# Altium PCB project_2.PcbDoc
Units mil, origin at the board's own origin, x right, y up, seen from the top; angles counter-clockwise.
Board outline 3900.9 x 2136.88 mil, 2 copper layers (Top Layer, Bottom Layer); 42 components, 62 nets, 220 pads, 22 vias.
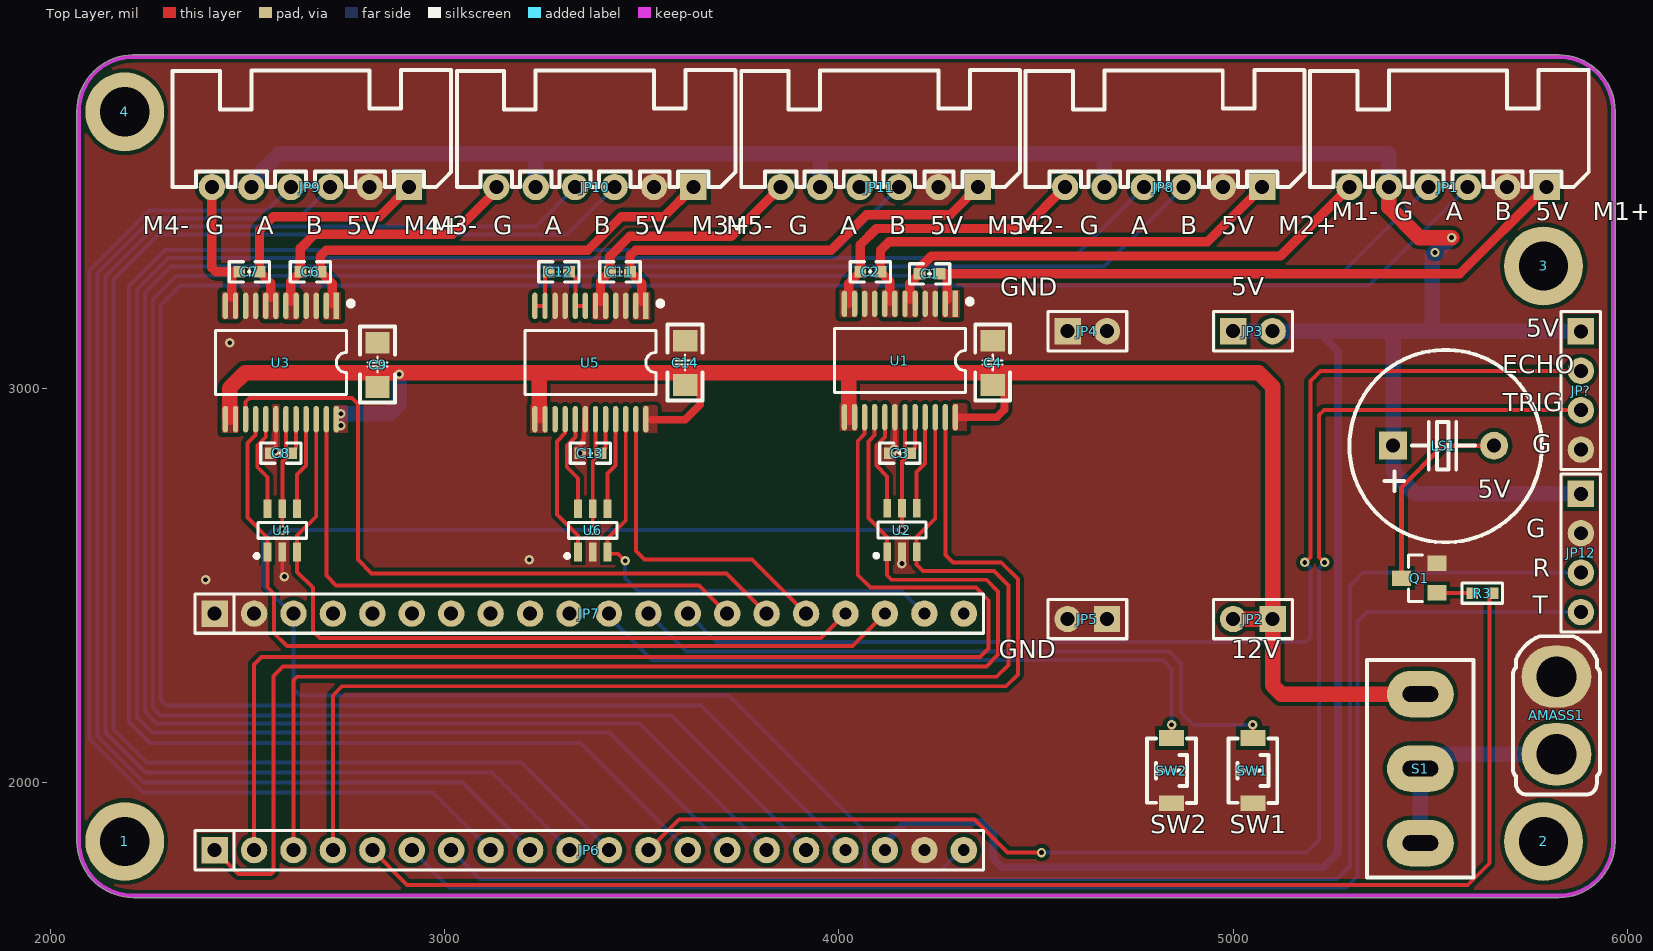
[diagram p0: Top Layer view]
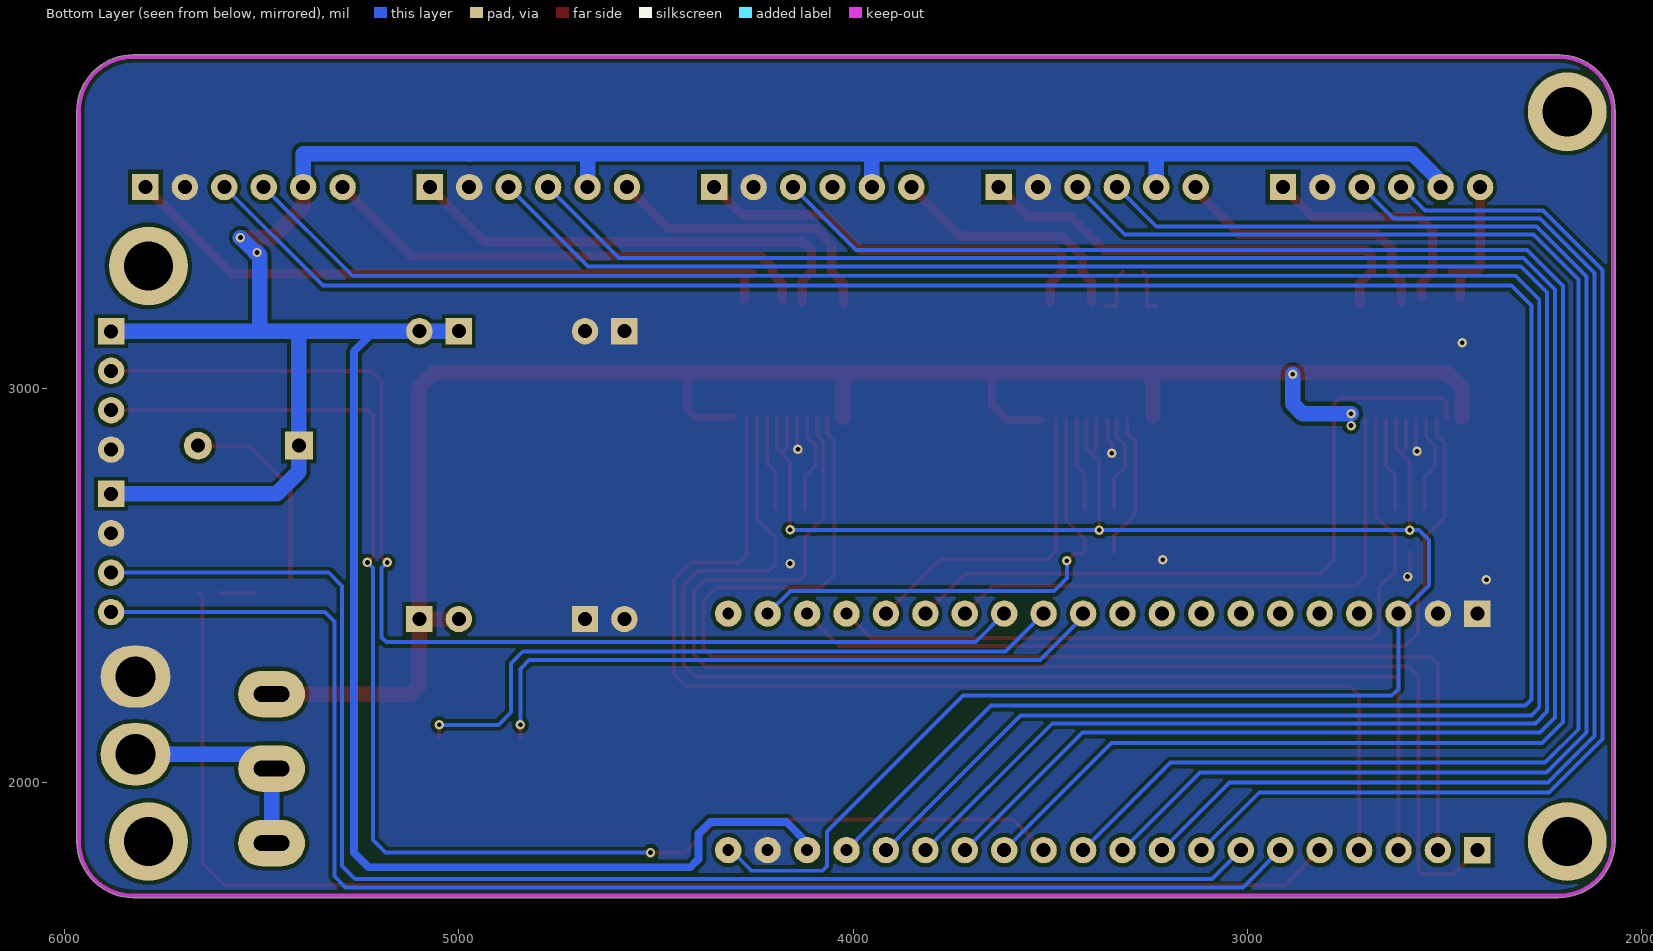
[diagram p1: Bottom Layer view, seen from below]

## Layer stack, top to bottom
Top Solder: solder mask 0.4, Solder Resist, Dk 3.5
Top Layer: signal copper 1.4
Dielectric 1: dielectric 12.6, FR-4, Dk 4.8
Bottom Layer: signal copper 1.4
Bottom Solder: solder mask 0.4, Solder Resist, Dk 3.5

## Board outline
2210,1708.13 ccw(c2210,1713.15) 2210.08,1708.13 5826.38,1708.13 5826.77,1708.13 ccw(c5826.77,1713.15) 5826.86,1708.14 ccw(c5826.38,1850.39) 5968.64,1849.91 ccw(c5826.38,1850.39) 5968.64,1850.39 ccw(c5826.38,1850.39) 5968.64,1850.39 5968.64,3702.7 ccw(c5963.62,3702.76) 5968.64,3702.76 ccw(c5826.38,3702.76) 5826.86,3845.01 ccw(c5826.38,3702.76) 5826.77,3845.01 ccw(c5826.38,3702.76) 5826.38,3845.01 5826.77,3845.01 cw(c5826.77,3840) 5826.86,3845.01 5826.77,3845.01 2210,3845.02 ccw(c2210,3840) 2209.94,3845.01 cw(c2210,3702.76) 2210,3845.01 2209.94,3845.01 ccw(c2210,3702.76) 2067.74,3702.76 ccw(c2072.76,3702.76) 2067.88,3701.57 ccw(c2072.76,3700.39) 2067.74,3700.39 2067.74,1850.39 ccw(c2210,1850.39)

## Design rules (kind name [scope] priority, off if disabled: settings)
Clearance [All] p1: gap=10 ignorepadtopadclearanceinfootprint=FALSE except(0: Arc-Hole Track-Hole SMDPad-Hole THPad-Hole Via-Hole Fill-Hole Poly-Hole Region-Hole Text-Hole)
PolygonConnect [All] p1: connectstyle=Direct reliefconductorwidth=10 reliefentries=4 polygonreliefangle="90 Angle" airgapwidth=10
RoutingVias [All] p1: holewidth=28 width=50 viastyle="Through Hole" minholewidth=28 minwidth=50 maxholewidth=28 maxwidth=50
SolderMaskExpansion [All] p1: expansion=4 istentingtop=FALSE
Width [All] p1: maxlimit=393.7 minlimit=10 preferedwidth=10 minimp=50.000000 maximp=50.000000 favimp=50.000000
30 further rules are at their usual default settings.

## Components (designator, comment, footprint, x,y, rotation, side; value= is the part's Value field where it differs from the comment)
1 "M3" "M3 125X200" 2188.98,1850.39 r90 top
2 "M3" "M3 125X200" 5787.4,1850.39 r90 top
3 "M3" "M3 125X200" 5787.4,3310 r90 top
4 "M3" "M3 125X200" 2188.98,3700.79 r90 top
AMASS1 "XT30x-F" XT30U-M 5820,2170 r90 top
C1 "100nF" "C 0603_L" 4230,3290 r0 top
C2 "100nF" "C 0603_L" 4080,3295 r0 top
C3 "100nF" "C 0603_L" 4155,2835 r0 top
C4 "100nF" "C 1206_L" 4390,3065 r270 top
C6 "100nF" "C 0603_L" 2660,3295 r0 top
C7 "100nF" "C 0603_L" 2505,3295 r0 top
C8 "100nF" "C 0603_L" 2585,2835 r0 top
C9 "100nF" "C 1206_L" 2830,3060 r270 top
C11 "100nF" "C 0603_L" 3445,3295 r0 top
C12 "100nF" "C 0603_L" 3290,3295 r0 top
C13 "100nF" "C 0603_L" 3370,2835 r0 top
C14 "100nF" "C 1206_L" 3610,3065 r270 top
JP1 "HDR-1X6" XH2.54-WI-6P 5545,3510 r180 top
JP2 "HDR-1X2" HDR2.54-LI-2P 5050.12,2414.41 r180 top
JP3 "HDR-1X2" HDR2.54-LI-2P 5050.12,3144.41 r0 top
JP4 "HDR-1X2" HDR2.54-LI-2P 4630.12,3144.41 r0 top
JP5 "HDR-1X2" HDR2.54-LI-2P 4630.12,2414.41 r180 top
JP6 "HDR-1X20" HDR2.54-LI-20P 3366.93,1828.23 r0 top locked
JP7 "HDR-1X20" HDR2.54-LI-20P 3366.93,2428.23 r0 top locked
JP8 "HDR-1X6" XH2.54-WI-6P 4823.75,3510 r180 top
JP9 "HDR-1X6" XH2.54-WI-6P 2660,3510 r180 top
JP10 "HDR-1X6" XH2.54-WI-6P 3381.25,3510 r180 top
JP11 "HDR-1X6" XH2.54-WI-6P 4102.5,3510 r180 top
JP12 "HDR-1X4" HDR2.54-LI-4P 5882,2582 r270 top
JP? "HDR-1X4" HDR2.54-LI-4P 5882,2994 r270 top
LS1 "Buzzer" BUZZER_1260_I 5534,2854 r270 top
Q1 "SS8050" SOT23-3N 5472,2518 r90 top
R3 "1K" "R 0603_L" 5632,2480 r0 top
S1 "SS-12F23" SS-12D10 5475,2035 r90 top
SW1 "6x6x5" "TSW SMD-3*4*2" 5050,2030 r270 top
SW2 "6x6x5" "TSW SMD-3*4*2" 4844,2030 r270 top
U1 "TB6612FNG" SSOP24_N 4155,3070 r270 top
U2 "SN76LVC2G14DBV" SOT23-6N 4160,2640 r0 top
U3 "TB6612FNG" SSOP24_N 2585,3065 r270 top
U4 "SN76LVC2G14DBV" SOT23-6N 2588.39,2639.41 r0 top
U5 "TB6612FNG" SSOP24_N 3370,3065 r270 top
U6 "SN76LVC2G14DBV" SOT23-6N 3375.89,2639.41 r0 top

## Footprints (in the part's own frame and the unit in brackets; to place one, negate y for a bottom-side part, rotate by r counter-clockwise, add the part's x,y. Pads: shape width x height; smd on the part's side, far side on the other; paste and mask are expansions set on the pad)
BUZZER_1260_I [mm] "6.5*12*6mm(脚距,直径,高度)"
  rect 1.8x1.8 hole 0.9: 1(0,-3.25)
  round 1.8 hole 0.9: 2(0,3.25)
  silkscreen extent -6.17,-6.07 6.22,6.33, body extent -6,-6 6,6, height 6.05
"C 0603_L" [mil] "无极性贴片电容"
  rect 30x30 smd: 1(-25.59,0) 2(25.59,0)
  silkscreen extent -51,-26 51,26, body extent -31,-16 31,16, height 32
"C 1206_L" [mil] "无极性贴片电容"
  rect 55x62 smd: 1(-55.12,0) 2(57.09,0)
  silkscreen extent -96,-44 96,44, body extent -63,-32 63,32, height 48
HDR2.54-LI-2P [mm] "排针，2脚"
  rect 1.7x1.7 hole 0.9: 1(-1.27,0)
  round 1.7 hole 0.9: 2(1.27,0)
  silkscreen extent -2.54,-1.27 2.54,1.27, body extent -2.54,-1.27 2.54,1.27, height 8.5
HDR2.54-LI-4P [mm] "排针，4脚"
  rect 1.7x1.7 hole 0.9: 1(-3.81,0)
  round 1.7 hole 0.9: 2(-1.27,0) 3(1.27,0) 4(3.81,0)
  silkscreen extent -5.08,-1.27 5.08,1.27, body extent -5.08,-1.27 5.08,1.27, height 8.5
HDR2.54-LI-20P [mm] "排针，20脚"
  rect 1.7x1.7 hole 0.9: 1(-24.13,0)
  round 1.7 hole 0.9: 2(-21.59,0) 3(-19.05,0) 4(-16.51,0) 5(-13.97,0) 6(-11.43,0) 7(-8.89,0) 8(-6.35,0) 9(-3.81,0) 10(-1.27,0) 11(1.27,0) 12(3.81,0) 13(6.35,0) 14(8.89,0) 15(11.43,0) 16(13.97,0)
  round 1.7 hole 0.762: 17(16.51,0) 18(19.05,0) 19(21.59,0) 20(24.13,0)
  silkscreen extent -25.4,-1.27 25.4,1.27, body extent -25.4,-1.27 25.4,1.27, height 8.5
"M3 125X200" [mil] "M3螺丝孔，孔125Mil，焊盘200Mil"
  round 200 hole 125: 1(0,0)
"R 0603_L" [mil] "1/10W贴片电阻"
  rect 30x30 smd: 1(-25.59,0) 2(25.59,0)
  silkscreen extent -51,-26 51,26, body extent -31,-16 32,16, height 16
SOT23-3N [mm] "3x1.3x1mm(长宽高)"
  rect 1x1.2 smd: 1(-0.95,-1.143) 2(0.95,-1.143) 3(0,1.143)
  silkscreen extent -1.5,-0.2 1.5,0.7, body extent -1.5,-1.2 1.5,1.2, height 1.05
SOT23-6N [mm] "3x1.6x1.1mm(长宽高)"
  rect 0.5x1.2 smd: 1(-0.95,-1.4) 2(0,-1.4) 3(0.95,-1.4) 4(0.95,1.4) 5(0,1.4) 6(-0.95,1.4)
  silkscreen extent -1.78,-1.78 1.55,0.51, body extent -1.5,-1.4 1.5,1.4, height 1.15
SS-12D10 [mm] "脚距4.8mm"
  oval 3x4.3 hole 2.3 slot 1 at 0 deg: 1(-4.8,0) 2(0,0) 3(4.8,0)
  silkscreen extent -7,-3.43 7,3.43, body extent -6.71,-3.3 6.71,3.3, height 11.8
SSOP24_N [mm] "8.3*7.8*1.6（长宽高）"
  rect 1.7x0.35 smd: 1(-3.65,3.575)
  oval 1.7x0.35 smd: 2(-3.65,2.925) 3(-3.65,2.275) 4(-3.65,1.625) 5(-3.65,0.975) 6(-3.65,0.325) 7(-3.65,-0.325) 8(-3.65,-0.975) 9(-3.65,-1.625) 10(-3.65,-2.275) 11(-3.65,-2.925) 12(-3.65,-3.575) 13(3.65,-3.575) 14(3.65,-2.925) 15(3.65,-2.275) 16(3.65,-1.625) 17(3.65,-0.975) 18(3.65,-0.325) 19(3.65,0.325) 20(3.65,0.975) 21(3.65,1.625) 22(3.65,2.275) 23(3.65,2.925) 24(3.65,3.575)
  silkscreen extent -3.93,-4.23 2.06,4.63, body extent -3.85,-4.15 3.85,4.15, height 1.65
"TSW SMD-3*4*2" [mm] "3*4*2mm"
  rect 1x1.6 smd: 1(-2.1,0) 2(2.1,0)
  silkscreen extent -2.08,-1.58 2.08,1.58, body extent -2.45,-1.45 2.45,1.45, height 2
XH2.54-WI-6P [mm] "接插件，6P"
  rect 1.7x1.7 hole 0.9: 1(-6.35,0)
  round 1.7 hole 0.9: 2(-3.81,0) 3(-1.27,0) 4(1.27,0) 5(3.81,0) 6(6.35,0)
  silkscreen extent -9.07,-7.53 8.89,0, body extent -8.85,-7.35 8.85,0.35, height 5.75
XT30U-M [mm] "长：10.2mm，宽：5.2mm，高：10.7mm"
  oval 4x4.5 hole 2.6: 1(-2.5,0) 2(2.5,0)
  silkscreen extent -5.1,-2.8 5.1,2.8, body extent -5.1,-2.8 5.1,2.8, height 10.71

## Part data
1 2 3 4: "铜柱孔"
AMASS1: library part XT30, "Amass防打火电源接口，XT30系列"
C1 C2 C3 C4 C6 C7 C8 C9 C11 C12 C13 C14: library part C, "无极性贴片电容", BOM名称=无极性, 学习资源=www.ooocke.
JP1 JP8 JP9 JP10 JP11: library part "Header 6", "6P接插件", BOM名称=6P接, 学习资源=www.ooocke.
JP2 JP3 JP4 JP5: library part "Header 2", "2P接插件", BOM名称=2P接, 学习资源=www.ooocke.
JP6 JP7: library part "Header 20", "20P接插件", BOM名称=20P接, 学习资源=www.ooocke.
JP12 JP?: library part "Header 4", "4P接插件"
  JP12: BOM名称=4P接, 学习资源=www.ooocke.
  JP?: BOM名称=4P接插件, 学习资源=www.ooocke.com, 版权归属=源创客
LS1: "蜂鸣器"
Q1: library part 8050-SMD, "高频放大-NPN型", BOM名称=高频放大, 学习资源=www.ooocke., 属性="40V 1.5A 1W 100MH"
R3: library part R, "贴片电阻", BOM名称=贴?, 学习资源=www.ooocke.
S1: library part SSW-1P, "1路拨动开关", BOM名称=波?, 学习资源=www.ooocke.
SW1 SW2: library part "TSW SMD-6x6", "贴片6x6轻触开关", BOM名称=贴片6x6?, 学习资源=www.ooocke.
U1 U3 U5: library part Component_1

## Via types
v1: diameter 24, hole 12, Top Layer to Bottom Layer, 22 vias

## Nets (pads, with @x,y where several pads share a name; then routed paths per layer and width w, separated by ;. In a path a pad name is that pad's centre, name@x,y a point inside that pad or via, vN(x,y) a via of type N, cw(c..) or ccw(c..) an arc to the next point about the centre after c; other vN are vias at no path point)
3V3: C3.2 C8.2 C13.2 JP6.20 JP7.3 U1.19 U1.20 U2.5 U3.19 U3.20 U4.5 U5.19 U5.20 U6.5 | length 5179.3
  Top Layer w10: v1(2588.39,2640) U4.5 2589.41,2695.54 2589.41,2813.82 C8.2 ; U3.19 2597.8,2847.79 C8.2 ; U3.20 2623.39,2847.8 C8.2 ; v1(3375.89,2640) U6.5 3375.89,2815.3 C13.2 ; U5.19 3382.8,2847.79 C13.2 ; U5.20 3408.39,2847.8 C13.2 ; v1(4160,2640.6) U2.5 4160,2814.41 C3.2 ; U1.19 4167.8,2847.79 C3.2 ; U1.20 4193.39,2847.8 C3.2
  Bottom Layer w10: 4096.46,2639.14 4095,2640.6 ; v1(4160,2640.6) 4095,2640.6 ; JP6.20 4310.23,1828.23 4258,1776 4078,1776 4066,1788 4066,1876 3722,2220 2634,2220 2616.93,2237.07 JP7.3 2611.77,2428.23 2540,2500 2540,2614.6 2565.41,2640 v1(2588.39,2640) v1(3375.89,2640) 3376.48,2640.6 4095,2640.6
5V: JP1.5 JP3.1 JP3.2 JP6.18 JP8.5 JP9.5 JP10.5 JP11.5 JP12.1 JP?.1 LS1.1 | length 8248.1
  Top Layer w39.37: JP1.5 5395,3459 5472,3382 v1(5554,3382)
  Bottom Layer w20: JP6.18 4116.93,1846.93 4170,1900 4362,1900 4392,1870 4392,1806 4413,1785 5229,1785 5266,1822 5266,3093.41 5215,3144.41
  Bottom Layer w39.37: JP9.5 2510,3524 2581,3595 3218,3595 ; JP10.5 3231.25,3581.75 3218,3595 ; JP11.5 3952.5,3591.5 3956,3595 ; JP8.5 4673.75,3589.25 4668,3595 ; 4973.75,3593.75 4975,3595 ; JP3.1 JP3.2 5215,3144.41 5499.41,3144.41 5505,3150 5505,3337 v1(5512,3344) 5516,3344 v1(5554,3382) ; JP1.5 5395,3595 4975,3595 ; JP12.1 5462,2732 5406.05,2787.95 LS1.1 5406.05,3144 JP?.1 ; 3218,3595 3956,3595 ; 3956,3595 4668,3595 ; 4668,3595 4975,3595
12VDC: C4.2 C9.2 C14.2 JP2.1 JP2.2 S1.3 U1.13 U1.14 U1.24 U3.13 U3.14 U3.24 U5.13 U5.14 U5.24 | length 4879
  Top Layer w19.68: 3525,2920 3610,2920 3648.56,2958.56 3648.56,3035 ; 4307.2,2925.91 4400.91,2925.91 4420,2945 4420,3039.41
  Top Layer w39.37: 2455,2925.91 2455,3000 2494.41,3039.41 3240,3039.41 ; 3240,2930 3240,3039.41 ; 4025,2926.3 4025,3039.41 ; JP2.2 JP2.1 ; S1.3 5122.02,2223.98 5100.12,2245.88 JP2.1 ; 3240,3039.41 4025,3039.41 ; 4025,3039.41 4420,3039.41 5064.59,3039.41 5100.12,3003.88 JP2.1
  Bottom Layer w39.37: v1(2737.2,2935) 2860,2935 2885,2960 v1(2885,3035)
  other v1: 2737.2,2905
BEEF: JP6.5 R3.2 | length 3580.5
  Top Layer w10: JP6.5 2905.16,1740 5595,1740 5650,1795 5650,2472.41 R3.2
DIR_M1: JP6.3 U1.22 U2.3 | length 3109.6
  Top Layer w10: JP6.3 2616.93,2258.93 2626,2268 4400,2268 4430,2298 4430,2500 4394,2536 4214,2536 4197.4,2552.6 U2.3 4197.4,2622.4 4244.57,2669.57 U1.22
DIR_M2: JP6.1 U1.16 U2.1 | length 3418.7
  Top Layer w10: JP6.1 2477.16,1768 2560,1768 2566,1774 2566,2270 2590,2294 4374,2294 4404,2324 4404,2484 4374,2514 4134,2514 4122.6,2525.4 U2.1 4122.6,2622.83 4075,2670.43 4075,2865 4091.02,2881.02 U1.16
DIR_M3: JP7.17 U3.22 U4.3 | length 1958.3
  Top Layer w10: U3.22 2674.57,2674.57 2625.79,2625.79 U4.3 2625.79,2534.21 2666,2494 2666,2384 2684,2366 3954.7,2366 JP7.17
DIR_M4: JP7.18 U3.16 U4.1 | length 2176.2
  Top Layer w10: U3.16 2521.02,2881.61 2500,2860.59 2500,2671.52 2550.98,2620.53 U4.1 2550.98,2495.02 2568,2478 2568,2378.4 2600.4,2346 4034.7,2346 JP7.18
DIR_M5: JP7.19 U5.22 U6.3 | length 1250.2
  Top Layer w10: v1(3458,2562) 3440,2580 3417.58,2580 U6.3 3413.29,2618.29 3459.57,2664.57 U5.22
  Bottom Layer w10: v1(3458,2562) 3458,2518 3490,2486 4159.16,2486 JP7.19
DIR_M6: U5.16 U6.1 | length 367.9
  Top Layer w10: U5.16 3306.02,2886.02 3285,2865 3285,2680 3338.48,2626.52 U6.1
ECHO: JP7.13 JP?.2 | length 2972.3
  Top Layer w10: v1(5182,2558) 5196,2572 5196,3018 5222,3044 JP?.2
  Bottom Layer w10: JP7.13 3689.16,2356 5184,2356 5196,2368 5196,2544 v1(5182,2558)
FBD+_1: JP1.3 JP6.17 | length 6334.1
  Bottom Layer w10: JP6.17 3650.16,2195 2295,2195 2280,2210 2280,3209.64 2330.35,3260 5345,3260 JP1.3
FBD+_2: JP6.15 JP8.3 | length 5529.4
  Bottom Layer w10: JP6.15 3495.16,2150 2270,2150 2240,2180 2240,3242.01 2306.57,3308.58 4672.33,3308.58 JP8.3
FBD+_3: JP6.11 JP10.3 | length 3892.8
  Bottom Layer w10: JP6.11 3195.16,2050 2244.85,2050 2160,2134.85 2160,3275.15 2274.85,3390 3311.25,3390 JP10.3
FBD+_4: JP6.9 JP9.3 | length 3070.9
  Bottom Layer w10: JP9.3 2630,3430 2258.28,3430 2120,3291.72 2120,2118.28 2238.28,2000 3045.16,2000 JP6.9
FBD+_5: JP6.13 JP11.3 | length 4703.7
  Bottom Layer w10: JP6.13@3610,1835 3345,2100 2253.43,2100 2200,2153.43 2200,3258.58 2291.42,3350 3992.5,3350 JP11.3
FBD-_1: JP1.4 JP6.16 | length 6194.8
  Bottom Layer w10: JP6.16 3575.16,2170 2280,2170 2260,2190 2260,3225 2320,3285 5270,3285 JP1.4
FBD-_2: JP6.14 JP8.4 | length 5383
  Bottom Layer w10: JP6.14 3418.59,2126.57 2258.43,2126.57 2220,2165 2220,3250.29 2299.71,3330 4593.75,3330 JP8.4
FBD-_3: JP6.10 JP10.4 | length 3742.5
  Bottom Layer w10: JP6.10 3120.16,2025 2241.57,2025 2140,2126.57 2140,3283.43 2266.57,3410 3231.25,3410 JP10.4
FBD-_4: JP6.8 JP9.4 | length 2920.6
  Bottom Layer w10: JP9.4 2550,3450 2250,3450 2100,3300 2100,2110 2235,1975 2970.16,1975 JP6.8
FBD-_5: JP11.4
GND: AMASS1.2 C3.1 C4.1 C8.1 C9.1 C13.1 C14.1 JP1.2 JP4.1 JP4.2 JP5.1 JP5.2 JP6.19 JP7.1 JP7.2 JP8.2 JP9.2 JP10.2 JP11.2 JP12.2 JP?.4 Q1.2 SW1.2 SW2.2 U1.3 U1.4 U1.9 U1.10 U1.18 U2.2 U3.3 U3.4 U3.9 U3.10 U3.18 U4.2 U5.3 U5.4 U5.9 U5.10 U5.18 U6.2 | length 344.4
  Top Layer w10: C8.1 2572.2,2847.8 U3.18 ; U4.2 2588.39,2527.61 v1(2594,2522) ; v1(3344.41,2835) 3344.41,2861.12 3353.5,2870.22 3353.5,2917.6 U5.18 ; C3.1 4142.2,2847.8 U1.18
  other v1: 2394,2514 4160,2555 3215,2565 2570,2840 4140,2845 2455,3115
KEY1: JP7.12 SW1.1 | length 1755.9
  Top Layer w10: SW1.1 v1(5050,2146)
  Bottom Layer w10: JP7.12 3613.16,2332 4838,2332 4868,2302 4868,2178 4900,2146 v1(5050,2146)
KEY2: JP7.11 SW2.1 | length 1665.8
  Top Layer w10: SW2.1 v1(4844,2146)
  Bottom Layer w10: JP7.11 3416.93,2419.07 3526,2310 4822,2310 4844,2288 v1(4844,2146)
M1+: C1.2 JP1.1 U1.1 U1.2 | length 1685.5
  Top Layer w23.62: C1.2 4275,3290 U1.2@4275,3225 ; 4285,3290 5575,3290 JP1.1
M1-: C1.1 JP1.6 U1.5 U1.6 | length 1265.3
  Top Layer w23.62: 4180,3225 4180,3265.59 C1.1 4204.41,3304.41 4235,3335 5120,3335 JP1.6
M2+: C2.2 JP8.1 U1.7 U1.8 | length 1174
  Top Layer w23.62: 4129.41,3220 4129.41,3271.18 C2.2 4105.59,3349.56 4127.4,3371.38 4935.13,3371.38 JP8.1
M2-: C2.1 JP8.6 U1.11 U1.12 | length 741
  Top Layer w23.62: 4025,3215 4025,3265.59 C2.1 4054.41,3363.97 4095.43,3405 4468.75,3405 JP8.6
M3+: C6.2 JP10.1 U3.1 U3.2 | length 1152
  Top Layer w23.62: 2715,3213.7 2715,3265.58 C6.2 2685.59,3335.59 2700,3350 3363.39,3350 3448.39,3435 3556.25,3435 JP10.1
M3-: C6.1 JP10.6 U3.5 U3.6 | length 707.5
  Top Layer w23.62: 2610,3220 2610,3270.59 C6.1 2634.41,3354.41 2670,3390 3020,3390 JP10.6@3135,3505
M4+: C7.2 JP9.1 U3.7 U3.8 | length 606.7
  Top Layer w23.62: 2559.41,3230.59 2559.41,3266.18 C7.2 2530.59,3400.59 2565,3435 2835,3435 JP9.1
M4-: C7.1 JP9.6 U3.11 U3.12 | length 345.6
  Top Layer w23.62: JP9.6 2410,3305 2420,3295 C7.1@2465,3295 ; 2460,3230 2460,3290 C7.1@2465,3295 ; C7.1 C7.1@2465,3295
M5+: C11.2 JP11.1 U5.1 U5.2 | length 1081.9
  Top Layer w23.62: 3500,3220 3500,3265.58 C11.2 3470.59,3335.59 3485,3350 3980,3350 4070,3440 4282.5,3440 JP11.1
M5-: C11.1 JP11.6 U5.5 U5.6 | length 630.1
  Top Layer w23.62: 3395.59,3220 3395.59,3271.18 C11.1 3419.41,3334.41 3470,3385 3727.5,3385 JP11.6
M6+: C12.2 U5.7 U5.8 | length 118.5
  Top Layer w10: C12.2 3331.61,3278.97 U5.8 U5.7
M6-: C12.1 U5.11 U5.12 | length 115.8
  Top Layer w10: U5.12 U5.11 3254.84,3285.43 C12.1
NetLS1_2: LS1.2 Q1.3 | length 509.4
  Top Layer w11.81: Q1.3 5427,2749 5532,2854 LS1.2
NetQ1_1: Q1.1 R3.1 | length 89.7
  Top Layer w10: Q1.1 5605.8,2480.6 R3.1
NetU1_17: U1.17 U2.6 | length 251.6
  Top Layer w10: U1.17 4116.61,2876.61 4095,2855 4095,2803.98 4122.6,2776.38 U2.6
NetU1_21: U1.21 U2.4 | length 240.1
  Top Layer w10: U2.4 4197.4,2787.4 4218.98,2808.98 U1.21
NetU3_17: U3.17 U4.6 | length 246.5
  Top Layer w10: U3.17 2546.61,2876.61 2525,2855 2525,2800 2550.98,2774.02 U4.6
NetU3_21: U3.21 U4.4 | length 236.4
  Top Layer w10: U4.4 2625.79,2780.79 2648.98,2803.98 U3.21
NetU5_17: U5.17 U6.6 | length 247.5
  Top Layer w10: U5.17 3331.61,2876.61 3310,2855 3310,2800 3338.48,2771.52 U6.6
NetU5_21: U5.21 U6.4 | length 235.3
  Top Layer w10: U6.4 3413.29,2783.29 3433.98,2803.98 U5.21
PA0: JP7.16 U5.23 | length 831.7
  Top Layer w10: U5.23 3485.16,2587.22 3507.38,2565 3780.16,2565 JP7.16
PA1: JP7.15 U3.15 | length 1827.5
  Top Layer w10: U3.15 2495.43,2965.43 2505,2975 2765,2975 2780,2960 2780,2565 2815,2530 3715.16,2530 JP7.15
PA2: JP7.14 U3.23 | length 1453.2
  Top Layer w10: U3.23 2700.16,2524.84 2725,2500 3645.16,2500 JP7.14
PA6: JP7.10
PA7: JP7.9
PA9: JP6.6 JP12.4 | length 3671.6
  Bottom Layer w10: JP6.6 3011.16,1734 5288,1734 5316,1762 5316,2408 5340,2432 JP12.4
PA10: JP6.7 JP12.3 | length 3633.2
  Bottom Layer w10: JP6.7 3050.73,1794.43 3090.16,1755 5263,1755 5296,1788 5296,2498 5330,2532 JP12.3
PB0: JP7.8
PB1: JP7.7
PB4: JP6.12 JP?.3 | length 3541.9
  Top Layer w10: JP6.12 3594.7,1906 4344,1906 4428,1822 v1(4514,1822) ; v1(5232,2558) 5218,2572 5218,2932 5230,2944 JP?.3
  Bottom Layer w10: v1@4512,1822 v1(4514,1822) 5186,1822 5218,1854 5218,2544 v1(5232,2558)
PB10: JP7.6
PB11: JP7.5
PB13: JP6.2 U1.15 | length 3238.8
  Top Layer w10: JP6.2 2516.93,2298.93 2536,2318 4358,2318 4380,2340 4380,2462 4348,2494 4080,2494 4047.99,2526.01 4047.99,2866.28 4065.43,2883.72 U1.15
PB15: JP6.4 U1.23 | length 2952
  Top Layer w10: JP6.4 2716.93,2220.93 2740,2244 4424,2244 4454,2274 4454,2516 4412,2558 4289.5,2558 4270.16,2577.34 U1.23
PWM_M6: U5.15
RST: JP7.4
VBAT: JP7.20
VIN: AMASS1.1 S1.1 S1.2 | length 607.9
  Top Layer w39.37: S1.2 S1.2@5505,2065 ; AMASS1.1@5778.43,2065 AMASS1.1@5790,2076.57
  Bottom Layer w39.37: S1.1 S1.2 5511.57,2071.57 AMASS1.1
pads on no net: 1.1 2.1 3.1 4.1

## Polygon pours and split planes (outlines as drawn)
GND on Top Layer "Top Layer-No Net" (solid, remove dead copper, pour order 47): 2210,1708.13 ccw(c2210,1713.15) 2210.08,1708.13 5826.38,1708.13 5826.77,1708.13 ccw(c5826.77,1713.15) 5826.86,1708.14 ccw(c5826.38,1850.39) 5968.64,1849.91 ccw(c5826.36,1850.39) 5968.64,1850.39 ccw(c5827.58,1850.39) 5968.64,1850.39 5968.64,3702.7 ccw(c5963.62,3702.76) 5968.64,3702.76 ccw(c5826.38,3702.76) 5826.86,3845.01 ccw(c5826.32,3702.73) 5826.77,3845.01 ccw(c5826.39,3702.76) 5826.38,3845.01 5826.77,3845.01 cw(c5826.77,3840) 5826.86,3845.01 5826.77,3845.01 2210,3845.02 ccw(c2210,3840) 2209.94,3845.01 cw(c2209.97,3702.87) 2210,3845.01 2209.94,3845.01 ccw(c2210,3702.76) 2067.74,3702.76 ccw(c2072.76,3702.76) 2067.88,3701.57 ccw(c2072.76,3700.39) 2067.74,3700.39 2067.74,1850.39 ccw(c2210,1850.39)
12VDC on Top Layer "Top Layer-12VDC" (solid, pour order 40): 4285.14,2961.3 4285.14,2891.3 4324.86,2891.3 4325.14,2961.3
12VDC on Top Layer "Top Layer-12VDC 1" (solid, pour order 38): 3500.14,2956.3 3500.14,2886.3 3539.86,2886.3 3540.14,2956.3
12VDC on Top Layer "Top Layer-12VDC 2" (solid, pour order 36): 2715,2956.3 2715,2886.3 2754.72,2886.3 2755,2956.3
12VDC on Top Layer "Top Layer-12VDC 3" (solid, pour order 34): 4002.8,2961.3 4002.8,2891.3 4047.2,2891.3 4047.2,2961.3
12VDC on Top Layer "Top Layer-12VDC 4" (solid, pour order 32): 3217.8,2956.3 3217.8,2886.3 3262.2,2886.3 3262.2,2956.3
12VDC on Top Layer "Top Layer-12VDC 5" (solid, pour order 30): 2435,2956.3 2435,2886.3 2479.41,2886.3 2479.41,2956.3
M1+ on Top Layer "Top Layer-M1+" (solid, pour order 28): 4262.8,3248.7 4262.8,3178.7 4307.2,3178.7 4307.2,3248.7
M1- on Top Layer "Top Layer-M1-" (solid, pour order 26): 4158.38,3248.7 4158.38,3178.7 4202.79,3178.7 4202.79,3248.7
M2+ on Top Layer "Top Layer-M2+" (solid, pour order 24): 4107.2,3250 4107.2,3180 4151.61,3180 4151.61,3250
M2- on Top Layer "Top Layer-M2-" (solid, pour order 22): 4002.8,3250 4002.8,3180 4047.2,3180 4047.2,3250
M5+ on Top Layer "Top Layer-M5+" (solid, pour order 20): 3477.8,3243.7 3477.8,3173.7 3522.2,3173.7 3522.2,3243.7
M5- on Top Layer "Top Layer-M5-" (solid, pour order 16): 3373.38,3243.7 3373.38,3173.7 3417.79,3173.7 3417.79,3243.7
M3+ on Top Layer "Top Layer-M3+" (solid, pour order 14): 2692.8,3243.7 2692.8,3173.7 2737.2,3173.7 2737.2,3243.7
M3- on Top Layer "Top Layer-M3-" (solid, pour order 12): 2588.38,3243.7 2588.38,3173.7 2632.79,3173.7 2632.79,3243.7
M4+ on Top Layer "Top Layer-M4+" (solid, pour order 6): 2537.2,3245 2537.2,3175 2581.61,3175 2581.61,3245
M4- on Top Layer "Top Layer-M4-" (solid, pour order 0): 2435,3245 2435,3175 2479.41,3175 2479.41,3245
GND on Bottom Layer "Top Layer-No Net1" (solid, remove dead copper, pour order 48): 2210,1708.13 ccw(c2210,1713.15) 2210.08,1708.13 5826.38,1708.13 5826.77,1708.13 ccw(c5826.77,1713.15) 5826.86,1708.14 ccw(c5826.38,1850.39) 5968.64,1849.91 ccw(c5826.36,1850.39) 5968.64,1850.39 ccw(c5827.58,1850.39) 5968.64,1850.39 5968.64,3702.7 ccw(c5963.62,3702.76) 5968.64,3702.76 ccw(c5826.38,3702.76) 5826.86,3845.01 ccw(c5826.32,3702.73) 5826.77,3845.01 ccw(c5826.39,3702.76) 5826.38,3845.01 5826.77,3845.01 cw(c5826.77,3840) 5826.86,3845.01 5826.77,3845.01 2210,3845.02 ccw(c2210,3840) 2209.94,3845.01 cw(c2209.97,3702.87) 2210,3845.01 2209.94,3845.01 ccw(c2210,3702.76) 2067.74,3702.76 ccw(c2072.76,3702.76) 2067.88,3701.57 ccw(c2072.76,3700.39) 2067.74,3700.39 2067.74,1850.39 ccw(c2210,1850.39)

## Keep-outs
Keep-Out Layer:
  lines w10: 2072.76,3700.39 2072.76,1850.39 ccw(c2210,1850.39) 2210,1713.15 5826.77,1713.15 ; 2072.76,3702.76 cw(c2210,3702.76) 2210,3840 5826.77,3840 ; 5826.38,1713.15 ccw(c5826.38,1850.39) 5963.62,1850.39 ; 5826.38,3840 cw(c5826.38,3702.76) 5963.62,3702.76 5963.62,1850

## Silkscreen, mask and mechanical layers (free items; w line width, h text height)
Top Overlay:
  text "M1-  G    A    B   5V   M1+" at 5250,3410 h78.74
  text "M4-  G    A    B   5V   M4+" at 2235,3375 h78.74
  text "M3-  G    A    B   5V   M3+" at 2965,3375 h78.74
  text "M5-  G    A    B   5V   M5+" at 3715,3375 h78.74
  text "M2-  G    A    B   5V   M2+" at 4452.5,3375 h78.74
  text "GND" at 4410,3219.61 h78.74
  text "5V" at 4995,3220 h78.74
  text "5V" at 5743.19,3115 h78.74
  text "ECHO" at 5682,3022 h78.74
  text "TRIG" at 5684,2926 h78.74
  text "G" at 5759.19,2821 h78.74
  text "5V" at 5620,2707 h78.74
  text "G" at 5743.19,2607 h78.74
  text "R" at 5760,2507 h78.74
  text "T" at 5760,2412 h78.74
  text "GND" at 4405,2299.61 h78.74
  text "12V" at 4995,2300 h78.74
  text "SW2" at 4790,1856 h78.74
  text "SW1" at 4992,1856 h78.74